# Altium PCB PCB.pcbdoc (part 2 of 2)
Units mil, origin at the board's own origin, x right, y up, seen from the top; angles counter-clockwise.
Board outline 16070 x 6016.88 mil, 4 copper layers (Top Layer, Inner1, Inner2, Bottom Layer); 148 components, 84 nets, 392 pads, 235 vias.
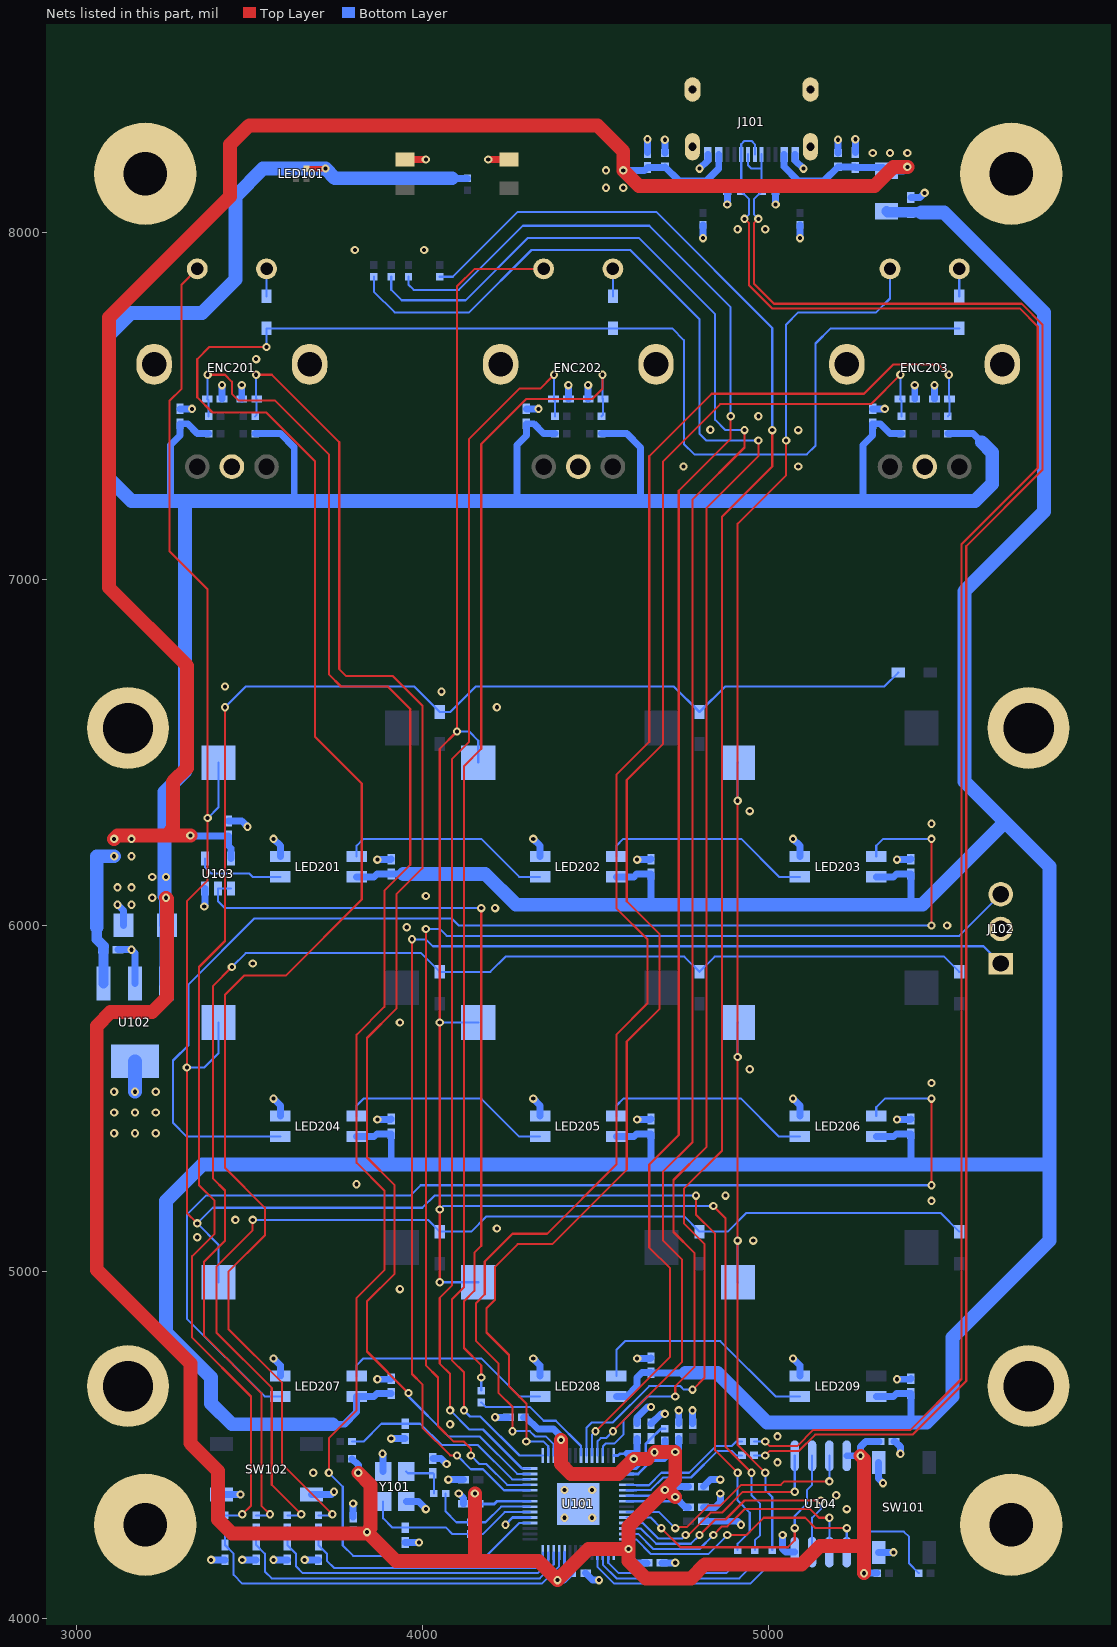
[diagram p4: the nets of this part, all layers, seen from the top]

## Via types
v1: diameter 24, hole 12, Top Layer to Bottom Layer, 235 vias

## Nets (pads, with @x,y where several pads share a name; then routed paths per layer and width w, separated by ;. In a path a pad name is that pad's centre, name@x,y a point inside that pad or via, vN(x,y) a via of type N, cw(c..) or ccw(c..) an arc to the next point about the centre after c; other vN are vias at no path point) (continued)
+3V3: C101.2 C102.2 C103.2 C104.2 C106.2 C112.2 C113.2 C114.2 C115.2 C116.2 C126.2 C201.2 C202.2 C207.2 LED101.1 R101.1 R104.2 R122.2 R123.2 R201.2 R202.2 R203.2 R204.2 R209.2 R210.2 U101.1 U101.10 U101.22 U101.33 U101.42 U101.44 U101.48 U101.49 U102.3 U104.8 | length 15005.1
  Top Layer w16: LED101.1@3665.16,8185.16 v1(3720,8185.16)
  Top Layer w40: v1(3260,6080) 3262.7,6077.3 3262.7,5792.7 3220,5750 3100,5750 3060,5710 3060,5005 3330,4735 3330,4505 3410,4425 3410,4285 3450,4245 3835,4245 3850,4260 3850,4385 v1(3815,4420) ; v1(3840,4248.54) 3923.54,4165 4161.46,4165 ; v1(4151.46,4360) 4151.46,4175 4161.46,4165 ; v1(4400,4515) 4400,4445 4428.28,4416.72 4566.72,4416.72 v1(4610,4460) 4650,4460 ; v1(4670,4478.99) 4671.01,4480 v1(4730,4480) 4730,4400 v1(4700,4370) ; v1(4730,4350) 4710,4370 v1(4700,4370) ; v1(5265,4468.98) 5275,4458.98 5275,4208.21 ; v1(5275,4130) 5275,4208.21 ; 4161.46,4165 4335,4165 v1(4390,4110) 4480,4200 v1(4595,4200) ; v1(4595,4200) 4595,4265 v1(4700,4370) ; v1(4595,4200) 4595,4165 4645,4115 4775,4115 4815,4155 5095,4155 5148.21,4208.21 5275,4208.21
  Bottom Layer w8.1: C114.2@4161.46,4330 4207.6,4330 4215.47,4337.87 U101.22@4310.23,4337.87 ; v1(4400,4515) 4410.64,4504.36 U101.33@4410.64,4469.77 ; U101.10@4410.64,4190.23 4410.64,4147.9 C115.2@4428.54,4130 ; U101.1@4552.36,4190.23 4565.23,4190.23 4575,4200 v1(4595,4200) ; U101.42@4552.36,4469.77 4564.77,4469.77 4570,4475 4590,4475 ; U101.49@4589.77,4337.87 4717.87,4337.87 v1(4730,4350) ; U101.48@4589.77,4353.62 4683.62,4353.62 v1(4700,4370) ; U101.44@4589.77,4416.61 4622.96,4416.61 4661.35,4455 4700,4455 4725,4480 v1(4730,4480)
  Bottom Layer w20: 3272.5,7225 3272.5,7387.5 3300,7415 C201.2@3300,7448.54 3321.46,7448.54 3350,7420 R201.2@3382.96,7420 ; R202.2@3517.04,7420 3590,7420 3630,7380 3630,7225 ; R123.2@3797.04,4460 3815,4442.04 v1(3815,4420) ; C101.2@3800,4248.54 v1(3840,4248.54) ; 4085,8157.04 R104.2@4130,8157.04 ; v1(4151.46,4360) 4161.46,4350 C114.2@4161.46,4330 ; 4272.5,7225 4272.5,7387.5 4300,7415 C202.2@4300,7448.54 4321.46,7448.54 4350,7420 R203.2@4382.96,7420 ; C113.2@4291.46,4580 4299.7,4580 4333.7,4546 4379,4546 4400,4525 v1(4400,4515) ; v1(4390,4110) 4408.54,4110 C115.2@4428.54,4130 ; R204.2@4517.04,7420 4590,7420 4630,7380 4630,7225 ; 4590,4475 4615,4475 ; v1(4595,4200) 4595,4180 4615,4160 C116.2@4648.54,4160 ; v1(4610,4460) 4610,4470 4615,4475 ; C104.2@4620,4518.54 4620,4480 4615,4475 ; v1@4670,4480 4685,4480 4700,4495 R101.1@4700,4512.96 ; v1(4700,4370) 4710,4380 C102.2@4768.54,4380 ; v1(4730,4350) 4760,4320 C103.2@4768.54,4320 ; v1(4730,4480) 4740,4490 C106.2@4740,4518.54 ; U104.8@5225,4468.98 v1(5265,4468.98) 5265,4495 5280,4510 C126.2@5318.54,4510 ; 5272.5,7225 5272.5,7387.5 5300,7415 C207.2@5300,7448.54 5321.46,7448.54 5350,7420 R209.2@5382.96,7420 ; v1(5275,4130) R122.2@5312.96,4130 ; R210.2@5517.04,7420 5590,7420 5615,7395
  Bottom Layer w40: U102.3@3260.55,5832.5 3260.55,5997.85 C112.2@3262.7,6000 3260,6002.7 v1(3260,6080) 3255,6085 3255,6385 3315,6445 3315,7225 ; v1@3720,8185 3747.96,8157.04 4085,8157.04 ; v1(3720,8185.16) 3540.16,8185.16 3460,8105 3460,7865 3363.63,7768.63 3158.63,7768.63 3095,7705 3095,7290 3160,7225 3272.5,7225 3315,7225 ; 5615,7395 5645,7365 5645,7275 5595,7225 5272.5,7225 4630,7225 4272.5,7225 3630,7225 3315,7225
  other v1: 3220,6080 3220,6140 3260,6140
+3V3_A: C105.2 R101.2 U101.43 | length 183.2
  Bottom Layer w8.1: U101.43@4589.77,4432.36 4617.36,4432.36 4645,4460 4645,4503.54 C105.2@4660,4518.54 4688.5,4547.04 R101.2@4700,4547.04
+5V_LEDS: C110.2 C210.2 C211.2 C212.2 C213.2 C214.2 C215.2 C216.2 C217.2 C218.2 LED201.1 LED202.1 LED203.1 LED204.1 LED205.1 LED206.1 LED207.1 LED208.1 LED209.1 R102.2 | length 12112.6
  Bottom Layer w20: 3745,4560 3775,4560 3810.24,4595.24 LED207.1@3810.24,4640.47 3860.47,4640.47 3868.54,4648.54 C216.2@3910,4648.54 ; LED204.1@3810.24,5390.47 3860.47,5390.47 3868.54,5398.54 C213.2@3910,5398.54 3910,5310 ; LED201.1@3810.24,6140.47 3860.47,6140.47 3868.54,6148.54 C210.2@3910,6148.54 3945,6148.54 ; LED208.1@4560.24,4640.47 4590.47,4640.47 4620,4670 4620,4695 4634.14,4709.14 4659.4,4709.14 C217.2@4660,4708.54 4760,4708.54 ; LED205.1@4560.24,5390.47 4610.47,5390.47 4618.54,5398.54 C214.2@4660,5398.54 4660,5310 ; LED202.1@4560.24,6140.47 4610.47,6140.47 4618.54,6148.54 C211.2@4660,6148.54 4660,6060 ; LED209.1@5310.24,4640.47 5360.47,4640.47 5368.54,4648.54 C218.2@5410,4648.54 5410,4565 ; LED206.1@5310.24,5390.47 5360.47,5390.47 5368.54,5398.54 C215.2@5410,5398.54 5410,5310 ; LED203.1@5310.24,6140.47 5360.47,6140.47 5368.54,6148.54 C212.2@5410,6148.54 5410,6060
  Bottom Layer w30: R102.2@5340,8061.78 5343.24,8058.54 C110.2@5410,8058.54 5440,8058.54
  Bottom Layer w40: 3740,4560 3450,4560 3390,4620 3390,4695 3260,4825 3260,5205 3365,5310 3910,5310 4660,5310 5410,5310 5810,5310 ; 3945,6148.54 4181.46,6148.54 4270,6060 4660,6060 5410,6060 5443.41,6060 5681.71,6298.29 ; 4760,4708.54 4851.46,4708.54 4995,4565 5410,4565 5455,4565 5530,4640 5530,4810 5810,5090 5810,5310 ; 5440,8058.54 5506.46,8058.54 5795,7770 5795,7195 5565,6965 5565,6415 5681.71,6298.29 ; 5681.71,6298.29 5810,6170 5810,5310
+5V_USB: C111.2 C118.2 C119.2 C125.2 D101.2 D102.2 J101.2 J101.11 R102.1 U102.1 U103.5 | length 5979
  Top Layer w40: v1(3110,6250) 3120,6260 3260.51,6260 ; v1(3330,6260) 3260.51,6260 ; v1(5400,8190) 5360,8190 5305,8135 4625,8135 v1(4580,8180) 4580,8235 4505,8310 3500,8310 3445,8255 3445,8105 3095,7755 3095,6975 3320,6750 3320,6455 3280,6415 3280,6279.49 3260.51,6260
  Bottom Layer w20: v1(3330,6260) 3331.46,6258.54 C125.2@3440,6258.54 3440,6230.26 3447.41,6222.85 U103.5@3447.41,6193.31 ; v1(4580,8180) 4641.46,8180 C118.2@4650,8188.54 4698.23,8188.54 D101.2@4700,8190.31 4740.31,8150 4820,8150 4855.52,8185.52 J101.2@4855.52,8226.5 ; J101.11@5044.49,8226.5 5044.49,8190.51 5085,8150 5159.69,8150 D102.2@5200,8190.31 5248.23,8190.31 C119.2@5250,8188.54 5329.68,8188.54 R102.1@5340,8178.22 5388.22,8178.22 v1(5400,8190)
  Bottom Layer w30: 3060,5995 3060,5960 3078.54,5941.46 ; C111.2@3078.54,5930 3078.54,5941.46 ; U102.1@3079.45,5832.5 C111.2@3079.45,5929.09 ; C111.2@3079.67,5940.33 3078.54,5941.46
  Bottom Layer w40: 3060,5995 3060,6200 v1(3110,6200)
  other v1: 3160,6200 3160,6250 4530,8130 4580,8130 4530,8180 5300,8230 5350,8230 5400,8230
COL0: ENC201.1 J201.1 J204.1 J207.1 R108.2 | length 6006.8
  Top Layer w6: v1(3350,5140) 3320,5170 v1(3320,5590) 3320,6070 3380,6130 v1(3380,6310) 3380,6970 3270,7080 3270,7515 3305,7550 3305,7850.64 ENC201.1@3350,7895.64 ; v1(4790,5220) 4790,5165 4845,5110 4845,4485 v1(4910,4420)
  Bottom Layer w6: v1@3325,5590 3370,5590 3411.24,5631.24 J204.1@3411.24,5720 ; v1(3380,6310) 3411.24,6341.24 J201.1@3411.24,6470 ; J207.1@3411.24,4970 3411.24,5078.76 v1(3350,5140) 3395,5185 4000,5185 4035,5220 v1(4790,5220) ; R108.2@4910,4197.04 4910,4215 4945,4250 4945,4305 4910,4340 v1(4910,4420)
COL0_R: R108.1 U101.2 | length 429.7
  Bottom Layer w6: U101.2@4536.61,4190.23 4536.61,4160 4566.61,4130 4877.04,4130 R108.1@4910,4162.96
COL1: ENC202.1 J202.1 J205.1 J208.1 R110.2 | length 5374.3
  Top Layer w6: v1(4050,4970) v1(4050,5180) v1(4050,5720) 4050,6510 v1(4100,6560) 4100,7845 4150.64,7895.64 ENC202.1@4350,7895.64 ; v1(4840,5190) 4875,5155 4875,4495 v1(4950,4420)
  Bottom Layer w6: v1(4050,4970) J208.1@4161.24,4970 ; v1(4050,5180) 4060,5190 v1(4840,5190) ; v1(4050,5720) J205.1@4161.24,5720 ; v1(4100,6560) 4135,6560 4161.24,6533.76 J202.1@4161.24,6470 ; v1(4950,4420) 4950,4355 4975,4330 4975,4240 4960,4225 R110.2@4960,4197.04
COL1_R: R110.1 U101.3 | length 512.8
  Bottom Layer w6: U101.3@4520.86,4190.23 4520.86,4154.54 4560.4,4115 4915,4115 4960,4160 R110.1@4960,4162.96
COL2: ENC203.1 J203.1 J206.1 J209.1 R112.2 | length 4385.6
  Top Layer w6: v1(4990,4420) 4910,4500 v1(4910,5090) v1(4910,5620) v1(4910,6360) 4910,7160 5050,7300 v1(5050,7400)
  Bottom Layer w6: v1(4910,5090) 4910,4971.24 J209.1@4911.24,4970 ; v1(4910,5620) 4910,5718.76 J206.1@4911.24,5720 ; v1(4910,6360) 4910,6468.76 J203.1@4911.24,6470 ; v1(4990,4420) 4990,4370 5010,4350 R112.2@5010,4197.04 ; v1(5050,7400) 5050,7735 5085,7770 5310,7770 5350,7810 ENC203.1@5350,7895.64
COL2_R: R112.1 U101.4 | length 592.4
  Bottom Layer w6: U101.4@4505.11,4190.23 4505.11,4149.07 4554.19,4100 4947.04,4100 R112.1@5010,4162.96
CON_USB_N: D103.2 J101.5 J101.7 R109.1 | length 5202.1
  Top Layer w6.1: v1(4930,8040) 4943.2,8026.8 4943.2,7847.57 5009.37,7781.4 5724.37,7781.4 5776.4,7729.37 5776.4,7320.63 5556.4,7100.63 5556.4,4690.63 5409.37,4543.6 5128.6,4543.6 5081.8,4496.8 5003.2,4496.8 v1(4990,4510)
  Bottom Layer w6.1: v1(4930,8040) 4943.2,8053.2 4943.2,8096.48 D103.2@4919.69,8120 4920.48,8120.79 J101.5@4920.48,8226.5 4920.48,8255.48 4930,8265 4950,8265 4959.85,8255.16 J101.7@4959.85,8226.5 ; R109.1@4957.04,4510 v1(4990,4510)
CON_USB_P: D104.2 J101.6 J101.8 R111.1 | length 5194.7
  Top Layer w6.1: v1(4970,8040) 4956.8,8026.8 4956.8,7853.2 5015,7795 5730,7795 5790,7735 5790,7315 5570,7095 5570,4685 5415,4530 5134.23,4530 5087.43,4483.2 5003.2,4483.2 v1(4990,4470)
  Bottom Layer w6.1: J101.6@4940.15,8226.5 4940.15,8194.84 4950,8185 4979.44,8185 4979.52,8185.09 ; R111.1@4957.04,4470 v1(4990,4470) ; v1(4970,8040) 4956.8,8053.2 4956.8,8096.48 D104.2@4980.31,8120 4979.52,8120.79 4979.52,8185.09 ; J101.8@4979.52,8226.5 4979.52,8185.09
ENC1_A: C203.2 R205.1 U101.18 | length 4686.8
  Top Layer w6: v1(3380,7590) 3430,7590 3450,7570 3450,7535 3470,7515 3575,7515 3730,7360 3730,6725 3765,6690 3900,6690 3965,6625 3965,6175 3890,6100 3890,5765 3810,5685 3810,5315 3890,5235 3890,5005 3810,4925 3810,4600 3730,4520 v1(3730,4420)
  Bottom Layer w6: v1(3380,7590) 3380,7521.46 C203.2@3378.54,7520 3382.96,7515.58 R205.1@3382.96,7470 ; v1(3730,4420) 3770,4380 3770,4210 3800,4180 4185,4180 4279.88,4274.88 U101.18@4310.23,4274.88
ENC1_B: C204.2 R207.1 U101.27 | length 4001.7
  Top Layer w6: v1(3520,7590) 3565,7590 3760,7395 3760,6740 3780,6720 3915,6720 4000,6635 4000,6165 3925,6090 3925,5760 3840,5675 3840,5330 3920,5250 3920,4995 3840,4915 3840,4770 v1(3960,4650)
  Bottom Layer w6: R207.1@3517.04,7470 3521.46,7474.42 C204.2@3521.46,7520 3520,7521.46 v1(3520,7590) ; v1(3960,4650) 3960,4640 4075,4525 4165,4525 4273.39,4416.61 U101.27@4310.23,4416.61
ENC1_SW: D210.2 ENC201.2 | length 79.5
  Bottom Layer w6: D210.2@3550,7816.16 ENC201.2@3550,7895.64
ENC2_A: C205.2 R206.1 U101.28 | length 3589.3
  Top Layer w6: v1(4080,4600) 4080,4705 4050,4735 4050,4925 4085,4960 4085,6480 4135,6530 4135,7405 4280,7550 4340,7550 v1@4375,7585
  Bottom Layer w6: v1(4080,4600) 4135,4545 4175,4545 4287.64,4432.36 U101.28@4310.23,4432.36 ; v1(4380,7590) 4380,7521.46 C205.2@4378.54,7520 4382.96,7515.58 R206.1@4382.96,7470
ENC2_B: C206.2 R208.1 U101.29 | length 3700
  Top Layer w6: v1(4120,4600) 4120,4710 4085,4745 4085,4920 4120,4955 4120,6460 4170,6510 4170,7390 4300,7520 4490,7520 4520,7550 v1(4520,7590)
  Bottom Layer w6: v1(4120,4600) 4137.5,4582.5 4167.5,4582.5 4280.23,4469.77 U101.29@4347.64,4469.77 ; R208.1@4517.04,7470 4521.46,7474.42 C206.2@4521.46,7520 4520,7521.46 v1(4520,7590)
ENC2_SW: D211.2 ENC202.2 | length 79.5
  Bottom Layer w6: D211.2@4550,7816.16 ENC202.2@4550,7895.64
ENC3_A: C208.2 R211.1 U101.30 | length 4232.9
  Top Layer w6: v1(4300,4510) 4300,4620 4250,4670 4250,4760 4185,4825 4185,4895 4210,4920 4210,5015 4275,5080 4375,5080 4590,5295 4590,5665 4685,5760 4685,5975 4590,6070 4590,6420 4695,6525 4695,7340 4860,7505 5295,7505 v1(5380,7590)
  Bottom Layer w6: v1(4300,4510) 4350,4510 4363.39,4496.61 U101.30@4363.39,4469.77 ; v1(5380,7590) 5380,7521.46 C208.2@5378.54,7520 5382.96,7515.58 R211.1@5382.96,7470
ENC3_B: C209.2 R212.1 U101.31 | length 4475.5
  Top Layer w6: v1(4260,4540) 4260,4610 4220,4650 4220,4735 4155,4800 4155,4910 4180,4935 4180,5030 4260,5110 4360,5110 4560,5310 4560,5685 4650,5775 4650,5960 4560,6050 4560,6435 4655,6530 4655,7355 4835,7535 5275,7535 5360,7620 5490,7620 v1(5520,7590)
  Bottom Layer w6: v1(4260,4540) 4310,4540 4325,4525 4356.21,4525 4379.14,4502.08 U101.31@4379.14,4469.77 ; R212.1@5517.04,7470 5521.46,7474.42 C209.2@5521.46,7520 5520,7521.46 v1(5520,7590)
ENC3_SW: D212.2 ENC203.2 | length 79.5
  Bottom Layer w6: D212.2@5550,7816.16 ENC203.2@5550,7895.64
GND: C101.1 C102.1 C103.1 C104.1 C105.1 C106.1 C107.1 C108.1 C109.1 C110.1 C111.1 C112.1 C113.1 C114.1 C115.1 C116.1 C117.1 C118.1 C119.1 C120.1 C121.1 C122.1 C123.2 C124.2 C125.1 C126.1 C127.1 C201.1 C202.1 C203.1 C204.1 C205.1 C206.1 C207.1 C208.1 C209.1 C210.1 C211.1 C212.1 C213.1 C214.1 C215.1 C216.1 C217.1 C218.1 D101.1 D102.1 D103.1 D104.1 ENC201.3 ENC201.4 ENC201.C ENC202.3 ENC202.4 ENC202.C ENC203.3 ENC203.4 ENC203.C J101.1 J101.12 J101.13 J101.14 J102.2 LED102.2 LED103.2 LED201.3 LED202.3 LED203.3 LED204.3 LED205.3 LED206.3 LED207.3 LED208.3 LED209.3 MH201.1 MH202.1 MH203.1 MH204.1 MH205.1 MH206.1 MH207.1 MH208.1 R118.1 R119.1 SW101.1 SW101.2 SW102.1 SW102.2 U101.19 U101.57 U102.2 U102.4 U103.3 U104.4 Y101.2 Y101.4 | length 3755
  Top Layer w20: LED103.2@3950,8211.35 v1(4010,8211.35) ; v1(4190,8211.35) LED102.2@4250,8211.35
  Bottom Layer w8.1: v1(4240,4270) 4260.63,4290.63 U101.19@4310.23,4290.63
  Bottom Layer w20: v1(3120,6060) 3137.3,6042.7 C112.1@3137.3,6000 ; C111.1@3121.46,5930 v1(3160,5930) 3170,5920 U102.2@3170,5832.5 ; C201.1@3300,7491.46 v1(3335,7491.46) ; v1(3370,6055) 3372.61,6057.6 U103.3@3372.61,6106.69 ; v1(3390,4168.54) C117.1@3430,4168.54 ; SW102.1@3420.08,4357.16 v1(3475,4357.16) ; C203.1@3421.46,7520 v1(3421.46,7560) ; C125.1@3440,6301.46 3478.54,6301.46 v1(3495,6285) ; C204.1@3478.54,7520 v1(3478.54,7560) ; v1(3480,4168.54) C120.1@3520,4168.54 ; v1(3570,4168.54) C121.1@3610,4168.54 ; v1(3570,4750) 3589.76,4730.24 LED207.3@3589.76,4699.53 ; v1(3570,5500) 3589.76,5480.24 LED204.3@3589.76,5449.53 ; v1(3570,6250) 3589.76,6230.24 LED201.3@3589.76,6199.53 ; v1(3660,4168.54) C122.1@3700,4168.54 ; SW102.2@3679.92,4357.16 3737.16,4357.16 v1(3745,4365) ; C101.1@3800,4291.46 v1(3800,4331.46) ; v1(3870,4690) 3908.54,4690 C216.1@3910,4691.46 ; v1(3870,5440) 3908.54,5440 C213.1@3910,5441.46 ; v1(3870,6190) 3908.54,6190 C210.1@3910,6191.46 ; v1(3885,4475) 3886.53,4473.47 Y101.2@3886.53,4423.31 ; v1(3910,4518.54) C127.1@3950,4518.54 ; C123.2@3950,4218.54 v1(3990,4218.54) ; Y101.4@3953.47,4336.69 3988.31,4336.69 v1(4010,4315) ; C124.2@4030,4461.46 4053.54,4461.46 v1(4070,4445) ; v1(4075,4400) C109.1@4118.54,4400 ; v1(4105,4360) 4118.54,4346.46 C114.1@4118.54,4330 ; v1(4210,4580) C113.1@4248.54,4580 ; C202.1@4300,7491.46 v1(4335,7491.46) ; v1(4320,4750) 4339.76,4730.24 LED208.3@4339.76,4699.53 ; v1(4320,5500) 4339.76,5480.24 LED205.3@4339.76,5449.53 ; v1(4320,6250) 4339.76,6230.24 LED202.3@4339.76,6199.53 ; C205.1@4421.46,7520 v1(4421.46,7560) ; C115.1@4471.46,4130 4491.46,4110 v1(4510,4110) ; C206.1@4478.54,7520 v1(4478.54,7560) ; C104.1@4620,4561.46 4620,4580 4650,4610 v1(4660,4610) ; v1(4620,4750) 4658.54,4750 C217.1@4660,4751.46 ; v1(4620,5440) 4658.54,5440 C214.1@4660,5441.46 ; v1(4620,6190) 4658.54,6190 C211.1@4660,6191.46 ; C118.1@4650,8231.46 v1(4650,8270) ; C105.1@4660,4561.46 4688.54,4590 v1(4700,4590) ; C116.1@4691.46,4160 v1(4730,4160) ; D101.1@4700,8229.68 v1(4700,8268.23) ; C106.1@4740,4561.46 v1(4740,4600) ; C107.1@4780,4561.46 v1(4780,4600) ; v1(4800,8185) 4824.02,8209.01 J101.1@4824.02,8226.5 ; v1(4810,7984.42) R119.1@4810,8022.96 ; C108.1@4811.46,4280 4910,4280 v1(4920,4270) ; C103.1@4811.46,4320 4845,4320 4860,4335 v1(4860,4360) ; C102.1@4811.46,4380 4831.46,4400 v1(4860,4400) ; v1(4880.31,8081.46) D103.1@4880.31,8120 ; v1(5019.69,8081.46) D104.1@5019.69,8120 ; v1(5040,4240) 5040,4200 5048.98,4191.02 U104.4@5075,4191.02 ; v1(5070,4750) 5089.76,4730.24 LED209.3@5089.76,4699.53 ; v1(5070,5500) 5089.76,5480.24 LED206.3@5089.76,5449.53 ; v1(5070,6250) 5089.76,6230.24 LED203.3@5089.76,6199.53 ; J101.12@5075.98,8226.5 5075.98,8209.01 v1(5100,8185) ; v1(5090,7984.42) R118.1@5090,8022.96 ; D102.1@5200,8229.68 v1(5200,8268.23) ; C119.1@5250,8231.46 v1(5250,8270) ; C207.1@5300,7491.46 v1(5335,7491.46) ; SW101.2@5317.16,4190.08 v1(5360,4190.08) ; SW101.1@5317.16,4449.92 5317.16,4402.84 v1(5330,4390) ; C126.1@5361.46,4510 5365,4510 5380,4495 v1(5380,4475) ; v1(5370,4690) 5408.54,4690 C218.1@5410,4691.46 ; v1(5370,5440) 5408.54,5440 C215.1@5410,5441.46 ; v1(5370,6190) 5408.54,6190 C212.1@5410,6191.46 ; C110.1@5410,8101.46 5436.46,8101.46 v1(5450,8115) ; C208.1@5421.46,7520 v1(5421.46,7560) ; C209.1@5478.54,7520 v1(5478.54,7560)
  Bottom Layer w40: v1(3170,5520) U102.4@3170,5607.5
  other v1: 4410,4290 4490,4290 5225,4315 5195,4355 4410,4370 4490,4370 3685,4420 5025,4450 5025,4525 4080,4560 3935,4950 4955,5090 3350,5100 4215,5125 3460,5150 5470,5205 4875,5220 3810,5252.75 3110,5400 3170,5400 3230,5400 3110,5460 3170,5460 3230,5460 3110,5520 3230,5520 5470,5545 4945,5585 3935,5720 3510,5890 3955,5995 5515,6000 4210,6050 3160,6060 4010,6085 3120,6110 3160,6110 5470,6293.51 4945,6330 4215,6630 4055,6675 3430,6690 4753.63,7325 5085,7325 5085,7430 4831.26,7431.26 4970,7470 3520,7635 3805,7950 4005,7950 4910,8010 4990,8010
LED0_BUF: R117.2 U103.1 U103.2 | length 2276.7
  Top Layer w6: v1(4170,4695) 4170,4730 4120,4780 4120,4915 4150,4945 4150,5055 4170,5075 v1(4170,6050)
  Bottom Layer w6: U103.1@3447.39,6106.69 U103.2@3410.01,6106.69 3410.01,6069.99 3430,6050 v1(4170,6050) ; R117.2@4170,4657.04 v1(4170,4695)
LED0_DIN: LED201.4 U103.4 | length 254.6
  Bottom Layer w6: U103.4@3372.59,6193.31 3372.59,6167.4 3390,6150 3500,6150 3510,6140 3589.29,6140 LED201.4@3589.76,6140.47
LED0_RES: R117.1 U101.36 | length 367.4
  Bottom Layer w6: R117.1@4170,4622.96 4182.96,4610 4310,4610 4350,4570 4385,4570 4457.88,4497.12 U101.36@4457.88,4469.77
LED1_DIN: LED201.2 LED202.4 | length 613.8
  Bottom Layer w6: LED201.2@3810.24,6199.53 3810.24,6230.24 3830,6250 4170,6250 4279.53,6140.47 LED202.4@4339.76,6140.47
LED2_DIN: LED202.2 LED203.4 | length 613.8
  Bottom Layer w6: LED202.2@4560.24,6199.53 4560.24,6230.24 4580,6250 4920,6250 5029.53,6140.47 LED203.4@5089.76,6140.47
LED3_DIN: LED203.2 LED204.4 | length 3425.4
  Top Layer w6: v1(5470,6000) v1(5470,6250)
  Bottom Layer w6: LED204.4@3589.76,5390.47 3319.53,5390.47 3280,5430 3280,5610 3325,5655 3325,5830 3515,6020 4085,6020 4105,6000 v1(5470,6000) ; LED203.2@5310.24,6199.53 5310.24,6230.24 5330,6250 v1(5470,6250)
LED4_DIN: LED204.2 LED205.4 | length 613.8
  Bottom Layer w6: LED204.2@3810.24,5449.53 3810.24,5480.24 3830,5500 4170,5500 4279.53,5390.47 LED205.4@4339.76,5390.47
LED5_DIN: LED205.2 LED206.4 | length 613.8
  Bottom Layer w6: LED205.2@4560.24,5449.53 4560.24,5480.24 4580,5500 4920,5500 5029.53,5390.47 LED206.4@5089.76,5390.47
LED6_DIN: LED206.2 LED207.4 | length 3293.7
  Top Layer w6: v1(5470,5250) v1(5470,5500)
  Bottom Layer w6: LED207.4@3589.76,4640.47 3544.53,4640.47 3320,4865 3320,5165 3375,5220 3965,5220 3995,5250 v1(5470,5250) ; LED206.2@5310.24,5449.53 5310.24,5475.24 5335,5500 v1(5470,5500)
LED7_DIN: LED207.2 LED208.4 | length 613.8
  Bottom Layer w6: LED207.2@3810.24,4699.53 3810.24,4730.24 3830,4750 4170,4750 4279.53,4640.47 LED208.4@4339.76,4640.47
LED8_DIN: LED208.2 LED209.4 | length 681.6
  Bottom Layer w6: LED208.2@4560.24,4699.53 4560.24,4775.24 4585,4800 4860,4800 5019.53,4640.47 LED209.4@5089.76,4640.47
QSPI_SCLK: U101.52 U104.6 | length 793.7
  Top Layer w6: v1(4690,4260) 4745,4205 5055,4205 5075,4225 v1(5075,4260)
  Bottom Layer w6: U101.52@4589.77,4290.63 4659.37,4290.63 v1(4690,4260) ; v1(5075,4260) 5075,4295 5110,4330 5110,4370 5125,4385 U104.6@5125,4468.98
QSPI_SD0: U101.53 U104.5 | length 663.7
  Top Layer w6: v1(4760,4240) 4767.47,4240 4832.47,4305 4865,4305 4925,4365 v1(5075,4365)
  Bottom Layer w6: U101.53@4589.77,4274.88 4636.33,4274.88 4681.21,4230 4750,4230 v1(4760,4240) ; v1(5075,4365) U104.5@5075,4468.98
QSPI_SD1: U101.55 U104.2 | length 760.2
  Top Layer w6: v1(4840,4240) 4865,4265 4880,4265 4930,4315 5120,4315 5145,4290 v1(5175,4290)
  Bottom Layer w6: U101.55@4589.77,4243.38 4622.83,4243.38 4666.21,4200 4800,4200 v1(4840,4240) ; U104.2@5175,4191.02 v1(5175,4290)
QSPI_SD2: U101.54 U104.3 | length 789.6
  Top Layer w6: v1(4800,4240) 4845,4285 4875,4285 4930,4340 v1(5150,4340)
  Bottom Layer w6: U101.54@4589.77,4259.13 4630.87,4259.13 4675,4215 4775,4215 v1(4800,4240) ; U104.3@5125,4191.02 5125,4290 5150,4315 v1(5150,4340)
QSPI_SD3: U101.51 U104.7 | length 734.3
  Top Layer w6: v1(4730,4260) 4733,4263 4763,4263 4825,4325 4860,4325 4920,4385 5035,4385 5045,4395 v1(5175,4395)
  Bottom Layer w6: U101.51@4589.77,4306.38 4683.62,4306.38 v1(4730,4260) ; v1(5175,4395) U104.7@5175,4468.98
QSPI_SS: R124.2 U101.56 U104.1 | length 1122.6
  Top Layer w6: v1(4880,4240) 4935,4240 4985,4290 5105,4290 5135,4260 v1(5225,4260)
  Bottom Layer w6: U101.56@4589.77,4227.64 4617.36,4227.64 4660,4185 4825,4185 v1(4880,4240) ; v1(5225,4260) U104.1@5225,4191.02 5256.02,4191.02 5270,4205 5270,4235 5285,4250 5390,4250 5405,4235 5405,4157.96 R124.2@5432.96,4130
RESET_N: C127.2 R125.2 U101.26 | length 601
  Bottom Layer w6: R125.2@3797.04,4510 3830,4510 3881.46,4561.46 C127.2@3950,4561.46 3993.54,4561.46 4055,4500 4160,4500 4259.14,4400.86 U101.26@4310.23,4400.86
ROW0: D201.1 D202.1 D203.1 R113.2 | length 4646.2
  Top Layer w6: v1(3430,6630) 3430,5955 3355,5880 3355,5250 3400,5205 3400,5110 3335,5045 3335,4810 3505,4640 3505,4325 v1(3480,4300)
  Bottom Layer w6: R113.2@3430,4297.04 3477.04,4297.04 v1(3480,4300) ; v1(3430,6630) 3490,6690 3976.16,6690 D201.1@4050,6616.16 4080,6616.16 4153.84,6690 4726.16,6690 D202.1@4800,6616.16 4873.84,6690 5333.84,6690 D203.1@5373.84,6730
ROW0_R: C117.2 R113.1 U101.11 | length 1159.6
  Bottom Layer w6: R113.1@3430,4262.96 C117.2@3430,4211.46 3455,4186.46 3455,4125 3480,4100 4345,4100 4394.89,4149.89 U101.11@4394.89,4190.23
ROW1: D204.1 D205.1 D206.1 R114.2 | length 3973.6
  Top Layer w6: v1(3450,5880) 3395,5825 3395,5270 3430,5235 3430,5090 3370,5030 3370,4815 3535,4650 3535,4325 v1(3560,4300)
  Bottom Layer w6: v1(3450,5880) 3490,5920 3996.16,5920 D204.1@4050,5866.16 4196.16,5866.16 4240,5910 4756.16,5910 D205.1@4800,5866.16 4843.84,5910 5506.16,5910 D206.1@5550,5866.16 ; R114.2@3520,4297.04 3557.04,4297.04 v1(3560,4300)
ROW1_R: C120.2 R114.1 U101.12 | length 1032.3
  Bottom Layer w6: R114.1@3520,4262.96 C120.2@3520,4211.46 3545,4186.46 3545,4135 3565,4115 4338.79,4115 4379.14,4155.35 U101.12@4379.14,4190.23
ROW2: D207.1 D208.1 D209.1 R115.2 | length 3171.1
  Top Layer w6: v1(3510,5150) 3510,5120 3405,5015 3405,4825 3565,4665 3565,4385 v1(3650,4300)
  Bottom Layer w6: v1(3510,5150) 4016.16,5150 D207.1@4050,5116.16 4141.16,5116.16 4185,5160 4756.16,5160 D208.1@4800,5116.16 4881.16,5116.16 4935,5170 5496.16,5170 D209.1@5550,5116.16 ; R115.2@3610,4297.04 3647.04,4297.04 v1(3650,4300)
ROW2_R: C121.2 R115.1 U101.13 | length 902.2
  Bottom Layer w6: R115.1@3610,4262.96 C121.2@3610,4211.46 3635,4186.46 3635,4150 3655,4130 4332.57,4130 4363.39,4160.81 U101.13@4363.39,4190.23
ROW3: D210.1 D211.1 D212.1 R116.2 | length 7031.4
  Top Layer w6: v1(3550,7670) 3385,7670 3350,7635 3350,7525 3394.09,7480.91 3549.09,7480.91 3690,7340 3690,6545 3825,6410 3825,6075 3605,5855 3485,5855 3430,5800 3430,5300 3545,5185 3545,5105 3440,5000 3440,4835 3595,4680 3595,4445 v1(3740,4300)
  Bottom Layer w6: v1(3550,7670) D210.1@3550,7723.84 D211.1@4550,7723.84 4721.16,7723.84 4755,7690 4755,7390 4785,7360 5110,7360 5135,7385 5135,7680 5178.84,7723.84 D212.1@5550,7723.84 ; R116.2@3700,4297.04 3737.04,4297.04 v1(3740,4300)
ROW3_R: C122.2 R116.1 U101.14 | length 772
  Bottom Layer w6: R116.1@3700,4262.96 C122.2@3700,4211.46 3700,4210.28 3725,4185.28 3725,4165 3745,4145 4326.36,4145 4347.64,4166.27 U101.14@4347.64,4190.23
SWCLK: J102.1 U101.24 | length 3536.5
  Top Layer w6: v1(3970,5960) 3970,4705 4000,4675 4000,4550 4080,4470 v1(4100,4470)
  Bottom Layer w6: v1(3970,5960) 4010,5960 4030,5940 5620,5940 J102.1@5670,5890 ; v1(4100,4470) 4140,4430 4175,4430 4235.63,4369.37 U101.24@4310.23,4369.37
SWDIO: J102.3 U101.25 | length 3514.8
  Top Layer w6: v1(4010,5990) 4010,4730 4045,4695 4045,4555 4090,4510 4120,4510 4140,4490 v1(4140,4470)
  Bottom Layer w6: v1(4010,5990) 4050,5990 4070,5970 5550,5970 J102.3@5670,6090 ; v1(4140,4470) 4165,4445 4185,4445 4244.88,4385.12 U101.25@4310.23,4385.12
USB_N: R109.2 U101.46 | length 385.8
  Bottom Layer w6.1: U101.46@4589.77,4385.12 4617.52,4385.12 4618.59,4384.05 4654.05,4384.05 4690,4420 4770,4420 4846.8,4496.8 4892.52,4496.8 4905.73,4510 R109.2@4922.96,4510
USB_P: R111.2 U101.47 | length 385.8
  Bottom Layer w6.1: U101.47@4589.77,4369.37 4617.52,4369.37 4618.59,4370.44 4659.68,4370.44 4695.63,4406.4 4775.63,4406.4 4852.43,4483.2 4892.52,4483.2 4905.73,4470 R111.2@4922.96,4470
USER_LED1: R103.2 U101.37 | length 4826.7
  Top Layer w6: v1(4780,4660) 4815,4695 4815,5080 4755,5140 4755,5240 4865,5350 4865,7180 5010,7325 v1(5010,7430)
  Bottom Layer w6: R103.2@4050,7872.96 4087.96,7872.96 4275,8060 4675,8060 5010,7725 v1(5010,7430) ; U101.37@4473.62,4469.77 4473.62,4550 4488.62,4565 4550,4565 4655,4670 4745,4670 4755,4660 v1(4780,4660)
USER_LED2_B: R107.2 U101.40 | length 4901
  Top Layer w6: v1(4730,4640) 4730,4670 4785,4725 4785,5055 4725,5115 4725,5265 4820,5360 4820,7205 4970,7355 v1(4970,7400)
  Bottom Layer w6: R107.2@3860,7872.96 3860,7830 3920,7770 4135,7770 4315,7950 4600,7950 4800,7750 4800,7420 4820,7400 v1(4970,7400) ; U101.40@4520.86,4469.77 4520.86,4495.86 4530,4505 4555,4505 4580,4530 4580,4570 4650,4640 v1(4730,4640)
USER_LED2_G: R106.2 U101.39 | length 4744.1
  Top Layer w6: v1(4550,4540) 4750,4740 4750,5035 4695,5090 4695,5290 4780,5375 4780,7230 4930,7380 v1(4930,7430)
  Bottom Layer w6: R106.2@3910,7872.96 3910,7835 3940,7805 4125,7805 4305,7985 4625,7985 4845,7765 4845,7460 4875,7430 v1(4930,7430) ; U101.39@4505.11,4469.77 4505.11,4510.11 4515,4520 4530,4520 v1(4550,4540)
USER_LED2_R: R105.2 U101.38 | length 4664
  Top Layer w6: v1(4500,4540) 4715,4755 4715,5010 4655,5070 4655,5310 4740,5395 4740,7255 4890,7405 v1(4890,7470)
  Bottom Layer w6: R105.2@3960,7872.96 3960,7850 3975,7835 4105,7835 4290,8020 4655,8020 4890,7785 v1(4890,7470) ; U101.38@4489.38,4469.77 4489.38,4529.38 v1(4500,4540)
X_R: C124.1 R121.1 Y101.3 | length 138.3
  Bottom Layer w6: Y101.3@3953.47,4423.31 3958.24,4418.54 C124.1@4030,4418.54 4032.96,4415.58 R121.1@4032.96,4360
XIN: C123.1 R120.2 U101.20 Y101.1 | length 517
  Bottom Layer w6: Y101.1@3886.53,4336.69 3886.53,4288.47 3913.54,4261.46 C123.1@3950,4261.46 4068.54,4261.46 4087.04,4242.96 R120.2@4140,4242.96 4174.17,4242.96 4237.59,4306.38 U101.20@4310.23,4306.38
XOUT: R120.1 R121.2 U101.21 | length 326.7
  Bottom Layer w6: R121.2@4067.04,4360 4067.04,4307.96 4097.96,4277.04 R120.1@4140,4277.04 4182.04,4277.04 4227.12,4322.12 U101.21@4310.23,4322.12
pads on no net: J101.3 J101.9 LED209.2 U101.5 U101.6 U101.7 U101.8 U101.9 U101.15 U101.16 U101.17 U101.32 U101.34 U101.35 U101.41

## Polygon pours and split planes (outlines as drawn)
+5V_USB on Top Layer (solid, remove dead copper, pour order 2): 3040,6385 3350,6385 3350,6180 3040,6180
+5V_USB on Bottom Layer (solid, remove dead copper, pour order 12): 3040,6265 3175,6265 3175,6180 3040,6180
+5V_LEDS on Bottom Layer (solid, remove dead copper, pour order 18): 5500,5630 5810,5630 5810,5310 5500,5310
no net on Bottom Layer (solid, remove dead copper, pour order 24): 3550,6930 5250,6930 5250,6700 3550,6700
GND on Bottom Layer (solid, remove dead copper, pour order 26): 3890,6880 4875.75,6880 4875.75,6677.09 3890,6677.09
+5V_USB on Bottom Layer (solid, remove dead copper, pour order 8): 4750,8200 4750,8110 4505,8110 4505,8200
+5V_USB on Top Layer (solid, remove dead copper, pour order 0): 4505,8200 5230,8200 5280,8250 5420,8250 5420,8080 4505,8080
+5V_USB on Bottom Layer (solid, remove dead copper, pour order 10): 5420,8150 5420,8250 5280,8250 5280,8200 5150,8200 5150,8135 5270,8135 5270,8150
+3V3 on Top Layer (solid, remove dead copper, pour order 4): 3205,6155 3205,6065 3295,6065 3295,6155
+3V3 on Top Layer (solid, remove dead copper, pour order 6): 3790,4445 3986.24,4445 4109.12,4322.12 4322.12,4322.12 4380,4380 4380,4445 4585,4445 4610,4470 4740,4470 4740,4365 4659.37,4284.37 4659.37,4174.37 4580,4095 3790,4095
GND on Bottom Layer (solid, remove dead copper, pour order 14): 3105,6125 3175,6125 3175,5955 3195,5935 3195,5730 3245,5730 3245,5385 3040,5385 3040,5730 3145,5730 3145,5895 3135,5905 3105,5905
+3V3 on Bottom Layer (solid, remove dead copper, pour order 16): 3205,6155 3295,6155 3295,5780 3230,5780 3230,6040 3205,6065

## Keep-outs
Board Outline Layer:
  lines w10: 3000,4270 3000,8170 cw(c3200,8170) 3200,8370 4720,8370 4720,8470 5180,8470 5180,8370 5700,8370 cw(c5700,8170) 5900,8170 5900,4270 cw(c5700,4270) 5700,4070 3200,4070 cw(c3200,4270) 3000,4270

## Other copper
Bottom Layer:
  drawing of 222 lines, arcs and shapes, not listed

## Silkscreen, mask and mechanical layers (free items; w line width, h text height)
Top Silkscreen Layer:
  text "RGB" at 3650,8060 h60
  text "USER" at 3650,8000 h60
  text "USER" at 3950,8000 h60
  text "POWER" at 4250,8000 h60
Bottom Silkscreen Layer:
  text "Did u star my repo?" at 3960,8210 h100
  text "hi lol" at 4440,8090 h80
  text "I wonder how many ppl are gna read this" at 4440,7930 h100
  text "STRATUS-The lowest layer" at 3110,7910 h80 r90
  text "how did we get here" at 5850,7340 h100 r90
  text ":)" at 5010,7070 h90
  text "Goated" at 3940,7060 h100
  text "lwk" at 4800,7060 h100
  text "STRATUS" at 4430,7050 h123
  text ":)" at 5380,7050 h90
  text ":)" at 5150,7040 h90
  text ":)" at 3540,7030 h90
  text ":)" at 3670,7000 h90
  text ":)" at 5290,6960 h90
  text "RIP ZORRO" at 3260,6950 h90 r90
  text "ik its cool" at 3460,6940 h70 r90
  text ":)" at 3850,6940 h90
  text ":)" at 5450,6910 h90
  text ":)" at 3580,6880 h90
  text "lmao" at 5730,6860 h100 r90
  text ":)" at 5340,6790 h90
  text ":)" at 3540,6730 h90
  text "U better know what ur doing" at 5890,5610 h100 r90
  text "DHRUVIN SARKAR" at 3160,5500 h80 r90
  text "Calm down ladies" at 3260,5170 h80 r90
  text "Jobless" at 5760,5050 h100 r90
  text "RESET" at 3380,4530 h80 r90
  text "BOOT" at 5580,4480 h80 r90
Bottom Solder Mask Layer:
  drawing of 4 lines, arcs and shapes, not listed
Mech6:
  text "Stratus Hackpad  © 2026 by Dhruvin Sarkar /  is licensed under Creative Commons Attribution-NonCommercial-ShareAlike 4.0 International.  / To view a copy of this license / , visit https://creativecommons.org/licenses/by-nc-sa/4.0/" at 5010,3000 h120

## Text inside footprints (layer, text, board x,y; h text height)
LED201: Bottom Silkscreen Layer "GND" at 3502.36,6210.55 h19.68 r180
LED202: Bottom Silkscreen Layer "GND" at 4252.36,6210.55 h19.68 r180
LED203: Bottom Silkscreen Layer "GND" at 5002.36,6210.55 h19.68 r180
LED204: Bottom Silkscreen Layer "GND" at 3502.36,5460.55 h19.68 r180
LED205: Bottom Silkscreen Layer "GND" at 4252.36,5460.55 h19.68 r180
LED206: Bottom Silkscreen Layer "GND" at 5002.36,5460.55 h19.68 r180
LED207: Bottom Silkscreen Layer "GND" at 3502.36,4710.55 h19.68 r180
LED208: Bottom Silkscreen Layer "GND" at 4252.36,4710.55 h19.68 r180
LED209: Bottom Silkscreen Layer "GND" at 5002.36,4710.55 h19.68 r180